# EAGLE board medi_charlie_10x10_with_header (EAGLE 6.2)
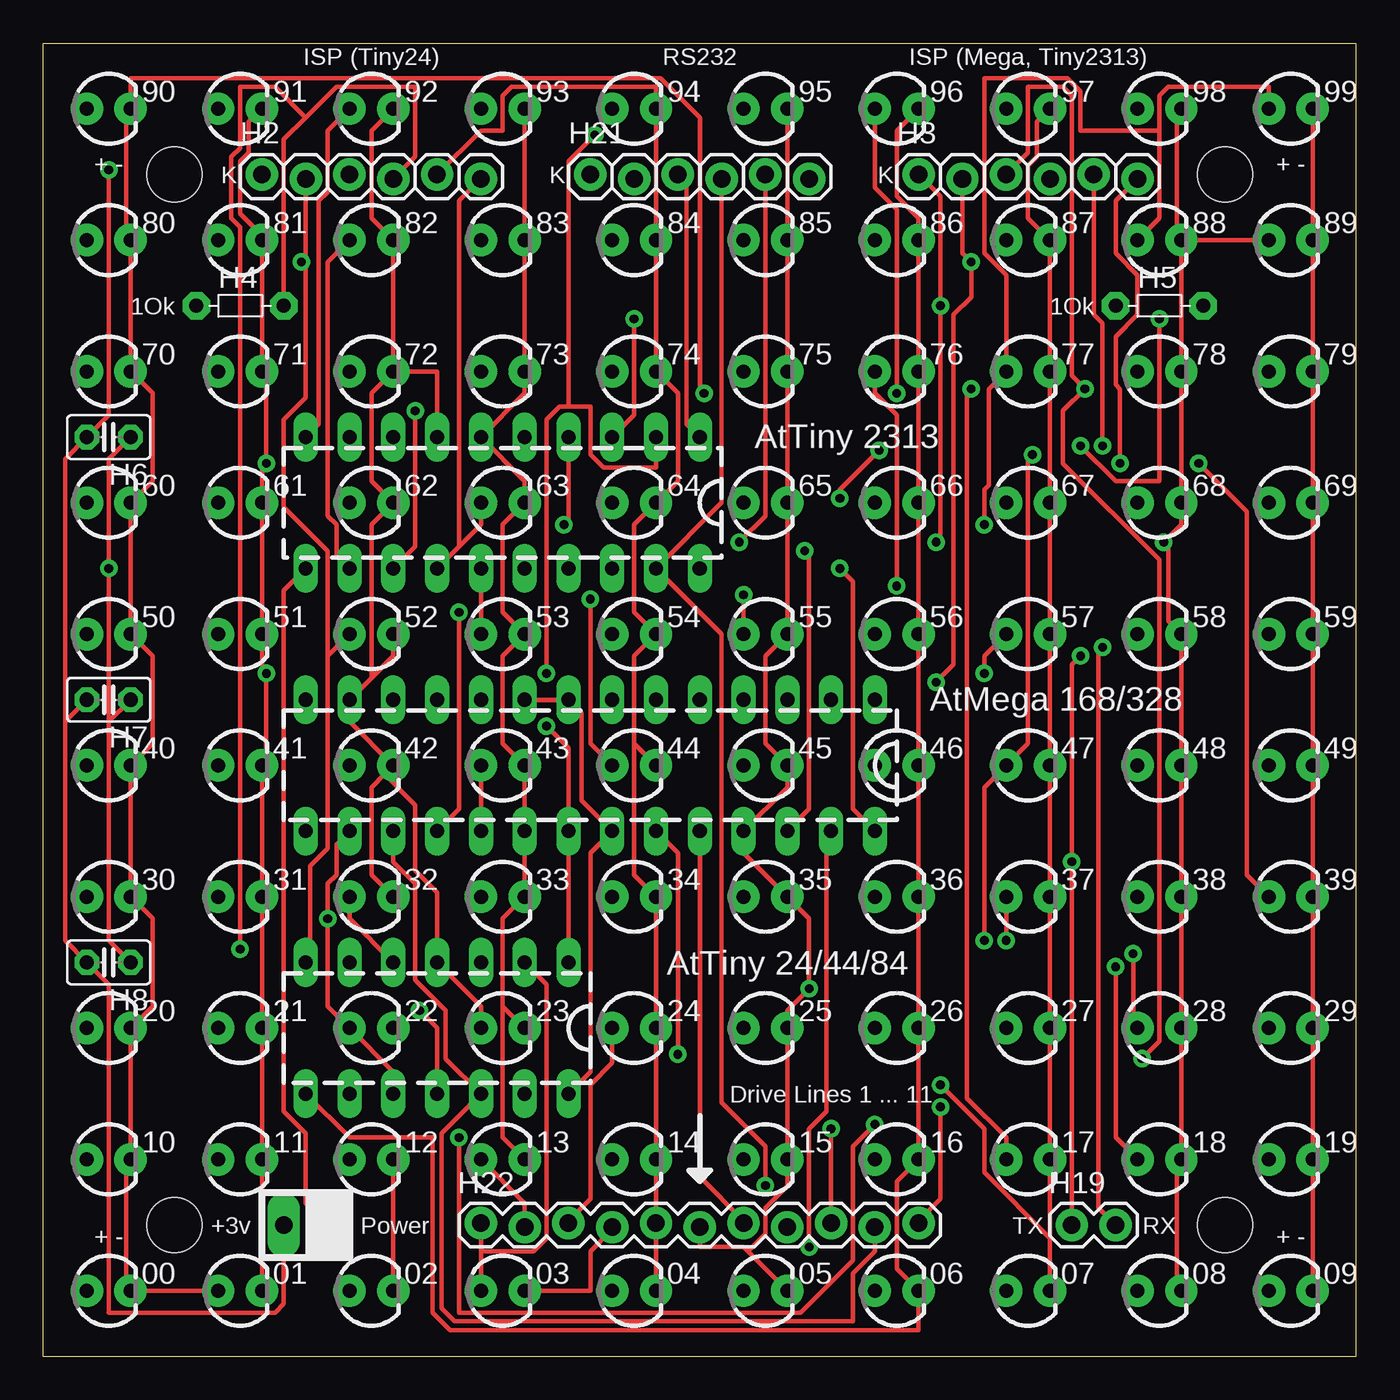
[diagram p0: board, top side]
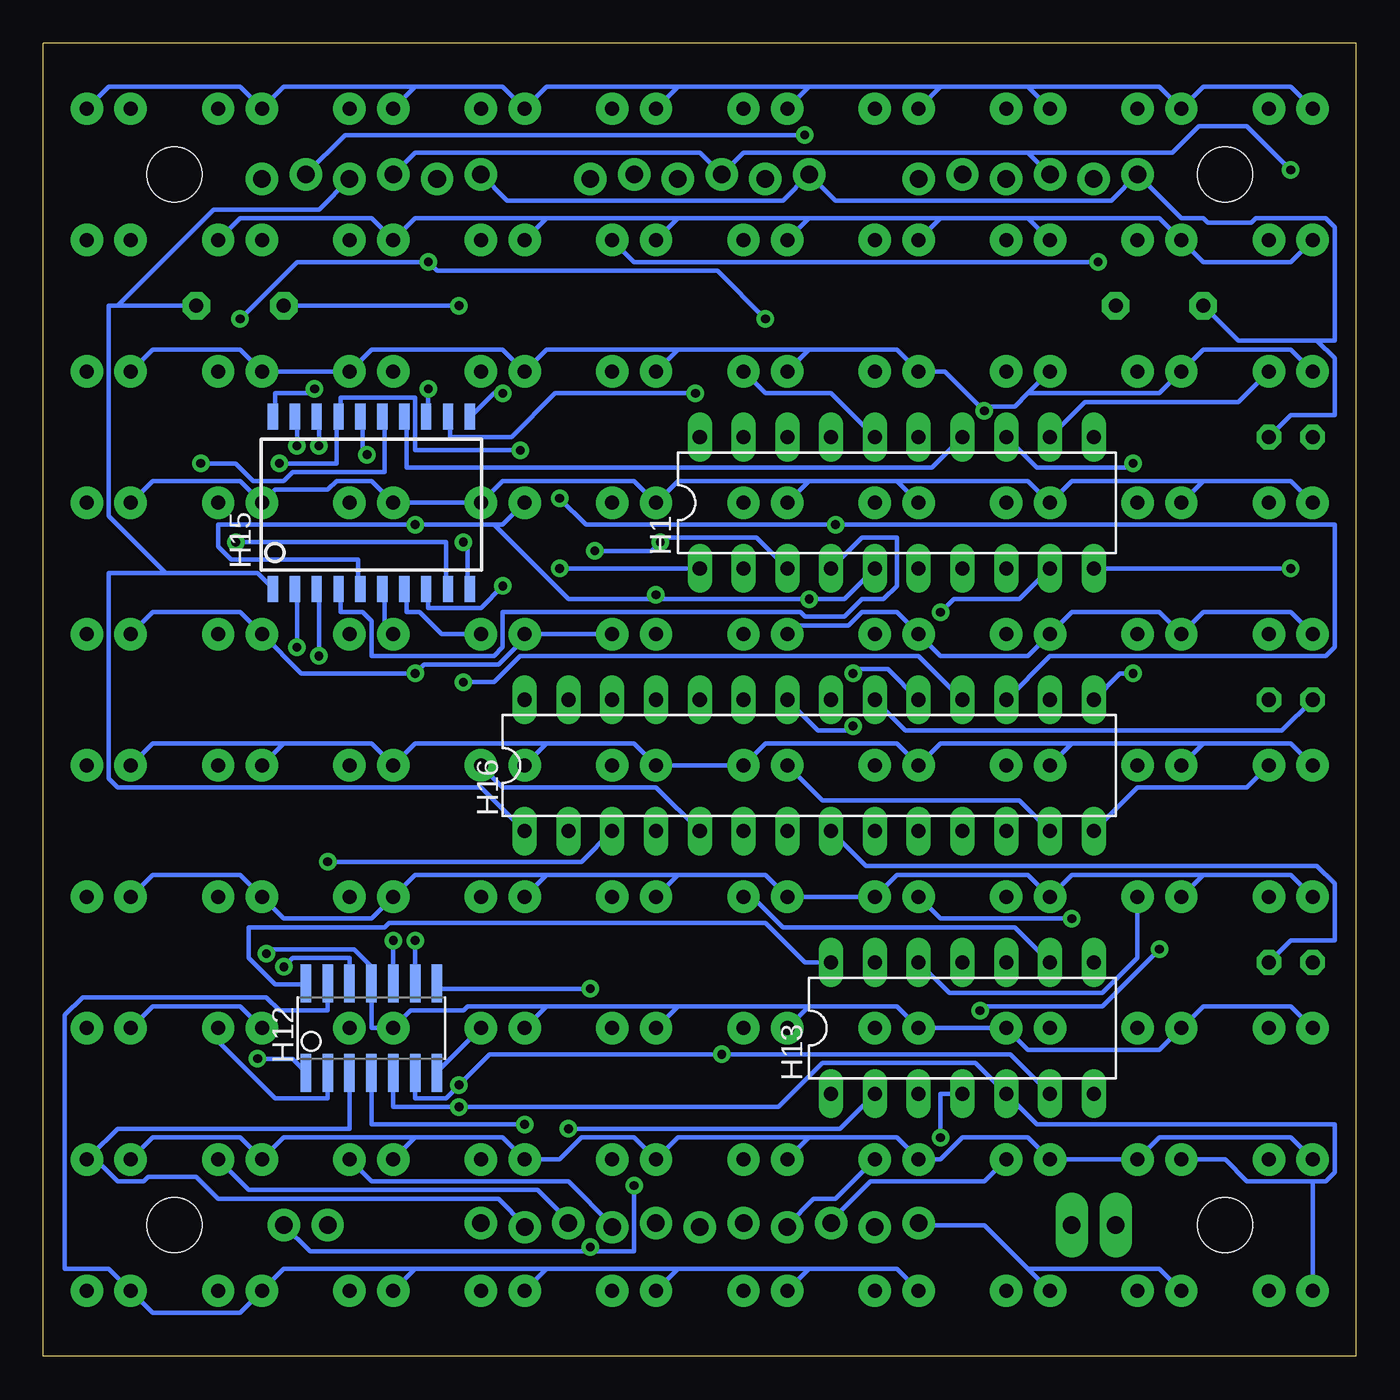
[diagram p1: board, bottom side, seen from below]

Size 76.2 x 76.2 mm. Coordinates in mm from the lower left corner, seen from the top.
Outline: 0,0 0,76.2 76.2,76.2 76.2,0 0,0
Copper layers (1*16): Top 0.035mm / dielectric 1.5mm / Bottom 0.035mm
Design rules: minimum track width 10mil, minimum drill 20mil, track to track 8mil, track to pad 8mil, pad to pad 8mil, via to via 8mil, smd to smd 8mil, copper to edge 40mil, drill to drill 8mil, minimum pad ring 12mil, minimum via ring 10mil, stop-mask expansion 4mil, vias tented up to drill 25mil, thermal gap 10mil
Holes 3.2 mm at 7.62,7.62 7.62,68.58 68.58,7.62 68.58,68.58

## Footprints (pad centres in the part's own frame; a part is rotated, then mirrored left to right if it is on the bottom)
LED3MM = drill 0.813 pad 1.88: A -1.27,0; K 1.27,0
DIL20 = drill 0.813 long: 1 -11.43,-3.81; 2 -8.89,-3.81; 3 -6.35,-3.81; 4 -3.81,-3.81; 5 -1.27,-3.81; 6 1.27,-3.81; 7 3.81,-3.81; 8 6.35,-3.81; 9 8.89,-3.81; 10 11.43,-3.81; 11 11.43,3.81; 12 8.89,3.81; 13 6.35,3.81; 14 3.81,3.81; 15 1.27,3.81; 16 -1.27,3.81; 17 -3.81,3.81; 18 -6.35,3.81; 19 -8.89,3.81; 20 -11.43,3.81
1X06_LOCK = drill 1.016 pad 1.88: 1 0,0; 2 2.54,-0.254; 3 5.08,0; 4 7.62,-0.254; 5 10.16,0; 6 12.7,-0.254
R-5 = drill 0.813 pad 1.6 octagon: 1 -2.54,0; 2 2.54,0
C025-025X050 = drill 0.813 octagon: 1 -1.27,0; 2 1.27,0
SOIC14 = smd 0.61 x 2.21: 1 -3.81,-2.603; 2 -2.54,-2.603; 3 -1.27,-2.603; 4 0,-2.603; 5 1.27,-2.603; 6 2.54,-2.603; 7 3.81,-2.603; 8 3.81,2.603; 9 2.54,2.603; 10 1.27,2.603; 11 0,2.603; 12 -1.27,2.603; 13 -2.54,2.603; 14 -3.81,2.603
DIL14 = drill 0.813 long: 1 -7.62,-3.81; 2 -5.08,-3.81; 3 -2.54,-3.81; 4 0,-3.81; 5 2.54,-3.81; 6 5.08,-3.81; 7 7.62,-3.81; 8 7.62,3.81; 9 5.08,3.81; 10 2.54,3.81; 11 0,3.81; 12 -2.54,3.81; 13 -5.08,3.81; 14 -7.62,3.81
SOIC20S = smd 0.6 x 1.5: 1 -5.715,-5; 2 -4.445,-5; 3 -3.175,-5; 4 -1.905,-5; 5 -0.635,-5; 6 0.635,-5; 7 1.905,-5; 8 3.175,-5; 9 4.445,-5; 10 5.715,-5; 11 5.715,5; 12 4.445,5; 13 3.175,5; 14 1.905,5; 15 0.635,5; 16 -0.635,5; 17 -1.905,5; 18 -3.175,5; 19 -4.445,5; 20 -5.715,5
DIL28-3 = drill 0.813 long: 1 -16.51,-3.81; 2 -13.97,-3.81; 3 -11.43,-3.81; 4 -8.89,-3.81; 5 -6.35,-3.81; 6 -3.81,-3.81; 7 -1.27,-3.81; 8 1.27,-3.81; 9 3.81,-3.81; 10 6.35,-3.81; 11 8.89,-3.81; 12 11.43,-3.81; 13 13.97,-3.81; 14 16.51,-3.81; 15 16.51,3.81; 16 13.97,3.81; 17 11.43,3.81; 18 8.89,3.81; 19 6.35,3.81; 20 3.81,3.81; 21 1.27,3.81; 22 -1.27,3.81; 23 -3.81,3.81; 24 -6.35,3.81; 25 -8.89,3.81; 26 -11.43,3.81; 27 -13.97,3.81; 28 -16.51,3.81
1X02_LONGPADS = drill 1.016 pad 1.88 long: 1 0,0; 2 2.54,0
1X02 = drill 1.016 pad 1.88: 1 0,0; 2 2.54,0
1X11_LOCK = drill 1.016 pad 1.88: 1 0,0.127; 2 2.54,-0.127; 3 5.08,0.127; 4 7.62,-0.127; 5 10.16,0.127; 6 12.7,-0.127; 7 15.24,0.127; 8 17.78,-0.127; 9 20.32,0.127; 10 22.86,-0.127; 11 25.4,0.127

## Placement (x,y rotation side)
00  [LED3MM]  3.81,3.81 0 top
01  [LED3MM]  11.43,3.81 0 top
02  [LED3MM]  19.05,3.81 0 top
03  [LED3MM]  26.67,3.81 0 top
04  [LED3MM]  34.29,3.81 0 top
05  [LED3MM]  41.91,3.81 0 top
06  [LED3MM]  49.53,3.81 0 top
07  [LED3MM]  57.15,3.81 0 top
08  [LED3MM]  64.77,3.81 0 top
09  [LED3MM]  72.39,3.81 0 top
10  [LED3MM]  3.81,11.43 0 top
11  [LED3MM]  11.43,11.43 0 top
12  [LED3MM]  19.05,11.43 0 top
13  [LED3MM]  26.67,11.43 0 top
14  [LED3MM]  34.29,11.43 0 top
15  [LED3MM]  41.91,11.43 0 top
16  [LED3MM]  49.53,11.43 0 top
17  [LED3MM]  57.15,11.43 0 top
18  [LED3MM]  64.77,11.43 0 top
19  [LED3MM]  72.39,11.43 0 top
20  [LED3MM]  3.81,19.05 0 top
21  [LED3MM]  11.43,19.05 0 top
22  [LED3MM]  19.05,19.05 0 top
23  [LED3MM]  26.67,19.05 0 top
24  [LED3MM]  34.29,19.05 0 top
25  [LED3MM]  41.91,19.05 0 top
26  [LED3MM]  49.53,19.05 0 top
27  [LED3MM]  57.15,19.05 0 top
28  [LED3MM]  64.77,19.05 0 top
29  [LED3MM]  72.39,19.05 0 top
30  [LED3MM]  3.81,26.67 0 top
31  [LED3MM]  11.43,26.67 0 top
32  [LED3MM]  19.05,26.67 0 top
33  [LED3MM]  26.67,26.67 0 top
34  [LED3MM]  34.29,26.67 0 top
35  [LED3MM]  41.91,26.67 0 top
36  [LED3MM]  49.53,26.67 0 top
37  [LED3MM]  57.15,26.67 0 top
38  [LED3MM]  64.77,26.67 0 top
39  [LED3MM]  72.39,26.67 0 top
40  [LED3MM]  3.81,34.29 0 top
41  [LED3MM]  11.43,34.29 0 top
42  [LED3MM]  19.05,34.29 0 top
43  [LED3MM]  26.67,34.29 0 top
44  [LED3MM]  34.29,34.29 0 top
45  [LED3MM]  41.91,34.29 0 top
46  [LED3MM]  49.53,34.29 0 top
47  [LED3MM]  57.15,34.29 0 top
48  [LED3MM]  64.77,34.29 0 top
49  [LED3MM]  72.39,34.29 0 top
50  [LED3MM]  3.81,41.91 0 top
51  [LED3MM]  11.43,41.91 0 top
52  [LED3MM]  19.05,41.91 0 top
53  [LED3MM]  26.67,41.91 0 top
54  [LED3MM]  34.29,41.91 0 top
55  [LED3MM]  41.91,41.91 0 top
56  [LED3MM]  49.53,41.91 0 top
57  [LED3MM]  57.15,41.91 0 top
58  [LED3MM]  64.77,41.91 0 top
59  [LED3MM]  72.39,41.91 0 top
60  [LED3MM]  3.81,49.53 0 top
61  [LED3MM]  11.43,49.53 0 top
62  [LED3MM]  19.05,49.53 0 top
63  [LED3MM]  26.67,49.53 0 top
64  [LED3MM]  34.29,49.53 0 top
65  [LED3MM]  41.91,49.53 0 top
66  [LED3MM]  49.53,49.53 0 top
67  [LED3MM]  57.15,49.53 0 top
68  [LED3MM]  64.77,49.53 0 top
69  [LED3MM]  72.39,49.53 0 top
70  [LED3MM]  3.81,57.15 0 top
71  [LED3MM]  11.43,57.15 0 top
72  [LED3MM]  19.05,57.15 0 top
73  [LED3MM]  26.67,57.15 0 top
74  [LED3MM]  34.29,57.15 0 top
75  [LED3MM]  41.91,57.15 0 top
76  [LED3MM]  49.53,57.15 0 top
77  [LED3MM]  57.15,57.15 0 top
78  [LED3MM]  64.77,57.15 0 top
79  [LED3MM]  72.39,57.15 0 top
80  [LED3MM]  3.81,64.77 0 top
81  [LED3MM]  11.43,64.77 0 top
82  [LED3MM]  19.05,64.77 0 top
83  [LED3MM]  26.67,64.77 0 top
84  [LED3MM]  34.29,64.77 0 top
85  [LED3MM]  41.91,64.77 0 top
86  [LED3MM]  49.53,64.77 0 top
87  [LED3MM]  57.15,64.77 0 top
88  [LED3MM]  64.77,64.77 0 top
89  [LED3MM]  72.39,64.77 0 top
90  [LED3MM]  3.81,72.39 0 top
91  [LED3MM]  11.43,72.39 0 top
92  [LED3MM]  19.05,72.39 0 top
93  [LED3MM]  26.67,72.39 0 top
94  [LED3MM]  34.29,72.39 0 top
95  [LED3MM]  41.91,72.39 0 top
96  [LED3MM]  49.53,72.39 0 top
97  [LED3MM]  57.15,72.39 0 top
98  [LED3MM]  64.77,72.39 0 top
99  [LED3MM]  72.39,72.39 0 top
H1  [DIL20]  26.67,49.53 0 bottom
H2  [1X06_LOCK]  12.7,68.58 0 top
H3  [1X06_LOCK]  50.8,68.58 0 top
H4  [R-5]  11.43,60.96 0 top
H5  [R-5]  64.77,60.96 0 top
H6  [C025-025X050]  3.81,53.34 180 top
H7  [C025-025X050]  3.81,38.1 180 top
H8  [C025-025X050]  3.81,22.86 180 top
H12  [SOIC14]  57.15,19.05 0 bottom
H13  [DIL14]  22.86,19.05 0 bottom
H15  [SOIC20S]  57.15,49.53 0 bottom
H16  [DIL28-3]  31.75,34.29 0 bottom
H17  [1X02_LONGPADS]  13.97,7.62 0 top
H19  [1X02]  59.69,7.62 0 top
H21  [1X06_LOCK]  31.75,68.58 0 top
H22  [1X11_LOCK]  25.4,7.62 0 top

## Library data of the parts
00 01-09 10-99 H2 H3 H17 H19 H21 H22 = SparkFun
H1 H13 H16 = 40xx
H4 H5 = discrete
H6-H8 = ref-packages
H12 = avr-5-4.16
H15 = atmel

## Nets
D: 00.A 11.A 22.A 33.A 44.A 55.A 66.A 77.A 88.A 99.A H1.5 H12.5 H13.5 H15.5 H16.13 H22.11
S0: 00.K 01.A 02.A 03.A 04.A 05.A 06.A 07.A 08.A 09.A 10.K 20.K 30.K 40.K 50.K 60.K 70.K 80.K 90.K H1.12 H12.13 H13.13 H15.12 H16.14 H22.1
S1: 01.K 10.A 11.K 12.A 13.A 14.A 15.A 16.A 17.A 18.A 19.A 21.K 31.K 41.K 51.K 61.K 71.K 81.K 91.K H1.13 H12.12 H13.12 H15.13 H16.15 H22.2
S2: 02.K 12.K 20.A 21.A 22.K 23.A 24.A 25.A 26.A 27.A 28.A 29.A 32.K 42.K 52.K 62.K 72.K 82.K 92.K H1.14 H12.11 H13.11 H15.14 H16.16 H22.3
S3: 03.K 13.K 23.K 30.A 31.A 32.A 33.K 34.A 35.A 36.A 37.A 38.A 39.A 43.K 53.K 63.K 73.K 83.K 93.K H1.15 H12.10 H13.10 H15.15 H16.9 H22.4
S4: 04.K 14.K 24.K 34.K 40.A 41.A 42.A 43.A 44.K 45.A 46.A 47.A 48.A 49.A 54.K 64.K 74.K 84.K 94.K H1.16 H2.5 H12.9 H13.9 H15.16 H16.10 H22.5
S5: 05.K 15.K 25.K 35.K 45.K 50.A 51.A 52.A 53.A 54.A 55.K 56.A 57.A 58.A 59.A 65.K 75.K 85.K 95.K H1.6 H2.2 H12.8 H13.8 H15.6 H16.4 H22.6
S6: 06.K 16.K 26.K 36.K 46.K 56.K 60.A 61.A 62.A 63.A 64.A 65.A 66.K 67.A 68.A 69.A 76.K 86.K 96.K H1.7 H2.6 H12.7 H13.7 H15.7 H16.5 H22.7
S7: 07.K 17.K 27.K 37.K 47.K 57.K 67.K 70.A 71.A 72.A 73.A 74.A 75.A 76.A 77.K 78.A 79.A 87.K 97.K H1.8 H12.6 H13.6 H15.8 H16.6 H22.8
S8: 08.K 18.K 28.K 38.K 48.K 58.K 68.K 78.K 80.A 81.A 82.A 83.A 84.A 85.A 86.A 87.A 88.K 89.A 98.K H1.9 H12.2 H13.2 H15.9 H16.11 H22.9
S9: 09.K 19.K 29.K 39.K 49.K 59.K 69.K 79.K 89.K 90.A 91.A 92.A 93.A 94.A 95.A 96.A 97.A 98.A 99.K H1.11 H12.3 H13.3 H15.11 H16.12 H22.10
S$1: H2.4 H4.2 H12.4 H13.4
S$2: H1.18 H3.2 H15.18 H16.18
S$5: H1.2 H15.2 H16.2 H19.2 H21.4
S$6: H1.3 H15.3 H16.3 H19.1 H21.5
S$7: H1.17 H3.6 H15.17 H16.17
S$8: H1.1 H3.4 H5.2 H15.1 H16.1
S$9: H1.19 H3.5 H15.19 H16.19
S$10: H1.4 H15.4
S$11: H1.20 H2.3 H3.3 H6.2 H7.2 H8.2 H12.1 H13.1 H15.20 H16.7 H16.20 H16.21 H17.1 H21.3
S$12: H1.10 H2.1 H3.1 H4.1 H5.1 H6.1 H7.1 H8.1 H12.14 H13.14 H15.10 H16.8 H16.22 H17.2 H21.1

## Tracks (layer width: path | path; a pad name or v marks a point on that pad's centre or on a via)
D  (via drill 0.51)
  Top 0.254: 88.A 64.77,66.04 64.77,71.12 | 64.77,71.12 64.77,73.15 65.28,73.66 71.12,73.66 99.A | v40.64,44.2 55.A | v54.61,48.26 54.61,50.29 54.86,50.55 54.86,56.13 77.A 55.88,62.74 54.61,64.01 54.61,74.17 59.44,74.17 60.2,73.41 60.2,71.12 64.77,71.12 | H16.13 17.02,29.72 17.02,27.94 16.51,27.43 v16.51,25.4 16.51,20.32 22.A 20.32,16.51 H13.5 | v52.07,14.48 52.07,9.14 50.8,7.87 H22.11 | v31.75,43.94 31.75,35.56 44.A
  Bottom 0.254: 50.04,48.26 49.53,48.26 66.A | 50.04,48.26 v54.61,48.26 66.04,48.26 66.04,46.99 65.28,46.23 57.91,46.23 57.91,44.7 H15.5 | H1.5 29.72,43.94 v31.75,43.94 40.64,43.94 | 40.64,43.94 45.72,43.94 50.04,48.26 | 40.64,43.94 v40.64,44.2 | 33.A 24.13,25.4 v16.51,25.4 | 44.A 30.99,32.26 19.56,32.26 H16.13 | 2.54,10.16 00.A | 2.54,10.16 6.35,10.16 7.62,11.43 11.A | H12.5 55.88,14.48 v52.07,14.48 33.53,14.48 30.99,17.02 22.1,17.02 H13.5 18.54,13.46 1.27,13.46 1.27,10.67 1.78,10.16 2.54,10.16
S0  (via drill 0.51)
  Top 0.254: 01.A 00.K 4.83,4.06 4.83,11.18 10.K 20.K 6.35,20.32 6.35,25.4 30.K 40.K 6.35,35.56 6.35,40.64 50.K 60.K 6.35,50.8 6.35,55.88 70.K 80.K 4.83,65.02 4.83,72.14 90.K 5.08,74.17 35.81,74.17 38.1,71.88 38.1,56.13 v38.35,55.88 | H13.13 29.21,21.59 29.21,6.86 28.45,6.1 25.4,6.1 | H22.1 25.4,6.1 | 25.4,6.1 03.A
  Bottom 0.254: H12.13 59.69,20.07 62.48,20.07 63.25,20.83 73.91,20.83 74.93,19.81 74.93,5.08 72.39,5.08 09.A 69.85,2.54 64.77,2.54 08.A 62.23,5.08 54.61,5.08 | 19.05,5.08 21.59,7.62 25.4,7.62 H22.1 | 19.05,5.08 02.A | 31.75,5.08 04.A | 31.75,5.08 26.67,5.08 03.A | 39.37,5.08 05.A | 31.75,5.08 39.37,5.08 | 46.99,5.08 06.A | 39.37,5.08 46.99,5.08 | 54.61,5.08 07.A | 46.99,5.08 54.61,5.08 | 01.A 11.43,5.08 19.05,5.08 | H16.14 12.7,33.02 6.35,33.02 40.K | H1.12 15.75,55.37 6.86,55.37 70.K | v38.35,55.88 46.48,55.88 49.02,53.34 52.58,53.34 52.58,54.36 H15.12
S1  (via drill 0.51)
  Top 0.254: 91.K 11.94,71.63 11.94,69.85 11.43,69.34 11.43,66.29 12.7,65.02 81.K 71.K 12.95,56.9 v12.95,51.82 12.7,51.56 61.K 51.K 12.7,39.88 v12.95,39.62 12.95,34.54 41.K 31.K 21.K 11.K 01.K | v62.23,22.61 62.23,12.7 18.A | 13.A 27.94,8.89 H22.2 | v53.85,56.13 53.59,55.88 53.59,14.99 55.88,12.7 17.A
  Bottom 0.254: H1.13 18.54,51.56 13.21,51.56 v12.95,51.82 | 10.A 3.81,12.7 11.43,12.7 11.K 12.A 19.05,12.7 22.86,12.7 24.13,11.43 13.A 26.67,12.7 31.75,12.7 | H16.15 13.72,39.62 v12.95,39.62 | H13.12 23.62,21.08 14.73,21.08 12.7,23.11 31.K | H12.12 58.42,23.11 61.72,23.11 v62.23,22.61 | 19.A 69.85,12.7 64.77,12.7 18.A 62.23,12.7 54.61,12.7 | 31.75,12.7 14.A | 31.75,12.7 39.37,12.7 15.A 41.91,12.7 44.96,12.7 46.23,11.43 16.A 49.53,12.7 54.61,12.7 | v53.85,56.13 53.85,54.61 H15.13 | 17.A 54.61,12.7
S2  (via drill 0.51)
  Top 0.254: 32.K 19.05,27.94 19.05,33.02 19.81,33.78 | 19.05,39.37 20.32,40.64 52.K | 19.05,39.37 H16.16 17.78,36.83 42.K 19.81,33.78 | 19.05,39.37 19.05,48.26 62.K 19.05,50.8 19.05,55.88 72.K | 72.K 22.86,57.15 H1.14 | 72.K 82.K 19.05,66.04 19.05,71.12 92.K | 12.K 02.K | 23.A 25.4,20.32 H13.11 22.86,26.92 21.59,28.19 21.59,32 19.81,33.78 | 28.A 63.25,19.3 v63.25,23.37 | 24.A 33.02,17.02 31.75,15.75 31.75,9.14 30.48,7.87 H22.3
  Bottom 0.254: H1.14 24.64,51.56 55.12,51.56 55.12,54.36 H15.14 | 12.K 21.59,10.16 28.19,10.16 30.48,7.87 H22.3 | 28.A 64.77,20.32 69.85,20.32 29.A | 20.A 3.81,20.32 8.89,20.32 21.A 11.43,17.78 19.05,17.78 22.K 23.A 26.67,20.32 31.75,20.32 | 31.75,20.32 24.A | 39.37,20.32 25.A | 31.75,20.32 39.37,20.32 | 46.99,20.32 26.A | 39.37,20.32 46.99,20.32 | 46.99,20.32 51.56,20.32 51.82,20.07 54.86,20.07 27.A 57.15,19.05 H12.11 57.15,22.61 58.17,23.62 62.99,23.62 v63.25,23.37
S3  (via drill 0.51)
  Top 0.254: v67.06,51.82 69.85,49.02 69.85,27.94 39.A | 93.K 83.K 73.K 27.94,55.88 H1.15 27.94,50.8 63.K 26.67,48.26 26.67,43.18 53.K 26.67,40.64 26.67,35.56 43.K H16.9 33.K 26.67,25.4 26.67,20.32 | H13.10 17.78,25.4 32.A | 03.K 31.75,3.81 31.75,6.1 33.02,7.37 H22.4 | 37.A v55.88,24.13 | 26.67,20.32 23.K | 13.K 26.67,12.7 26.67,20.32
  Bottom 0.254: v67.06,51.82 65.02,51.82 64.01,50.8 62.23,50.8 61.72,51.31 56.39,51.31 56.39,54.36 H15.15 | 39.A 69.85,27.94 64.77,27.94 38.A 62.23,25.4 57.15,25.4 37.A 54.61,27.94 46.99,27.94 | 30.A 3.81,27.94 8.89,27.94 | 31.A 8.89,27.94 | 8.89,27.94 16.51,27.94 32.A 19.05,27.94 26.67,27.94 33.K 34.A 34.29,27.94 39.37,27.94 | 13.K 30.23,9.14 31.5,9.14 33.02,7.62 H22.4 | v55.88,24.13 H12.10 | 39.37,27.94 35.A | 46.99,27.94 36.A | 39.37,27.94 46.99,27.94
S4  (via drill 0.51)
  Top 0.254: v57.4,52.32 57.15,52.07 57.15,35.56 47.A 54.61,33.02 v54.61,24.13 | 04.K H22.5 14.K 24.K 34.K 34.29,27.94 34.29,35.56 | H2.5 25.4,71.12 26.67,71.12 26.67,73.15 27.18,73.66 35.56,73.66 94.K 84.K 74.K 36.83,55.88 36.83,50.8 64.K 34.29,48.26 34.29,43.18 54.K 34.29,40.64 34.29,35.56 | 43.A H16.10 | 44.K 34.29,35.56
  Bottom 0.254: v57.4,52.32 57.66,52.32 57.66,54.36 H15.16 | v54.61,24.13 H12.9 | 62.23,35.56 48.A | 62.23,35.56 57.15,35.56 47.A 54.61,35.56 46.99,35.56 | 49.A 69.85,35.56 62.23,35.56 | H13.9 19.81,24.89 33.27,24.89 35.05,26.67 34.K | H1.16 30.48,55.88 34.29,55.88 74.K | 40.A 3.81,35.56 8.89,35.56 | 41.A 8.89,35.56 | 16.51,35.56 42.A | 8.89,35.56 16.51,35.56 | 16.51,35.56 24.13,35.56 43.A 26.67,35.56 34.29,35.56 44.K 45.A 41.91,35.56 46.99,35.56 | 46.99,35.56 46.A
S5  (via drill 0.51)
  Top 0.254: 53.A H1.6 | H13.8 15.49,23.11 15.49,28.45 16.51,29.46 16.51,40.64 | 52.A 16.51,40.64 | 15.24,63.5 15.24,55.63 13.97,54.36 13.97,49.28 16.51,46.74 16.51,40.64 | 15.24,63.5 H2.2 | 40.89,6.1 40.64,6.35 38.1,6.35 H22.6 | 40.89,6.1 05.K | 40.89,6.1 41.91,7.11 41.91,8.64 43.18,9.91 15.K 25.K 43.18,20.07 v44.45,21.34 44.45,25.4 35.K 40.64,29.21 H16.4 43.18,33.02 45.K 41.91,35.56 41.91,40.64 55.K 65.K 75.K 85.K 95.K | 57.A 54.61,40.64 v54.61,39.62 | v14.99,63.5 15.24,63.5
  Bottom 0.254: 54.A 32.51,42.42 29.46,42.42 28.7,43.18 26.67,43.18 53.A 24.13,40.64 19.05,40.64 52.A 16.51,43.18 11.43,43.18 51.A 8.89,43.18 3.81,43.18 50.A | v44.45,21.34 53.09,21.34 53.34,21.59 H12.8 | 59.A 69.85,43.18 64.77,43.18 58.A 61.21,39.62 v54.61,39.62 54.1,40.13 49.78,40.13 48.01,41.91 | 57.A 56.39,41.91 56.39,44.45 H15.6 | 48.01,41.91 55.K | 48.01,41.91 56.A | v14.99,63.5 41.91,63.5 85.K
S6
  Top 0.254: 24.13,46.99 25.4,48.26 63.A | 24.13,46.99 H1.7 | H2.6 24.13,67.06 24.13,46.99 | H13.7 17.78,12.7 22.61,12.7 22.61,2.54 23.62,1.52 50.8,1.52 06.K 49.53,5.08 49.53,10.16 16.K 26.K 36.K 46.K 56.K 66.K 76.K 86.K 50.8,66.04 49.53,67.31 49.53,71.12 96.K | H16.5 38.1,10.41 40.64,7.87 H22.7
  Bottom 0.254: 60.A 3.81,50.8 8.89,50.8 | 61.A 8.89,50.8 | 8.89,50.8 16.51,50.8 62.A 19.05,50.8 26.67,50.8 | 31.75,50.8 64.A | 26.67,50.8 31.75,50.8 | 63.A 26.67,50.8 | 31.75,50.8 39.37,50.8 65.A 41.91,50.8 49.53,50.8 66.K 67.A 57.15,50.8 59.18,50.8 59.69,50.29 62.74,50.29 68.A 64.77,50.8 69.85,50.8 69.A | 26.K 53.34,16.51 H12.7 | H16.5 40.64,33.02 49.53,33.02 46.K | 56.K 53.09,41.91 54.36,43.18 55.12,43.18 55.12,44.45 H15.7
S7  (via drill 0.51)
  Top 0.254: v49.53,44.7 49.53,54.61 48.26,55.88 76.A | H1.8 21.59,46.99 v21.59,54.86 | H16.6 36.83,29.21 v36.83,17.53 | 97.K 57.66,71.63 57.66,69.6 57.15,69.09 57.15,66.04 87.K 77.K 67.K 57.K 47.K 37.K 27.K 17.K 58.42,6.86 | 58.42,6.86 07.K | v52.07,15.75 54.61,13.21 54.61,10.67 58.42,6.86
  Bottom 0.254: v49.53,44.7 50.8,43.43 53.85,43.43 53.85,44.45 H15.8 | 70.A 3.81,58.42 8.89,58.42 71.A 11.43,55.88 19.05,55.88 | 21.84,55.12 23.88,57.15 73.A 26.67,58.42 31.75,58.42 | 19.05,55.88 19.81,55.12 21.84,55.12 | 19.05,55.88 72.A | 21.84,55.12 v21.59,54.86 | 31.75,58.42 74.A | 39.37,58.42 75.A | 31.75,58.42 39.37,58.42 | 39.37,58.42 46.99,58.42 76.A 49.53,58.42 57.15,58.42 77.K 78.A 64.77,58.42 69.85,58.42 79.A | H12.6 54.61,14.99 52.83,14.99 v52.07,15.75 50.29,17.53 v36.83,17.53 20.07,17.53 H13.6 | 17.K 57.15,10.16 45.72,10.16 43.18,7.62 H22.8
S8  (via drill 0.51)
  Top 0.254: H1.9 17.02,46.48 17.02,48.26 16.51,48.77 16.51,63.5 82.A | H16.11 24.13,31.75 v24.13,43.18 | H22.9 v45.72,13.21 | 88.K 78.K 68.K 66.04,48.26 65.28,47.5 | 88.K 89.A | 98.K 65.79,72.14 65.79,65.02 88.K | 65.28,47.5 65.28,42.67 58.K 48.K 38.K 28.K 18.K 65.79,11.18 65.79,4.06 08.K | 65.28,47.5 v65.02,47.24
  Bottom 0.254: 80.A 3.81,63.5 8.89,63.5 81.A 11.43,66.04 19.05,66.04 | v24.13,43.18 23.37,43.94 19.56,43.94 H1.9 | 24.13,66.04 83.A | 19.05,66.04 24.13,66.04 | 82.A 19.05,66.04 | 31.75,66.04 84.A | 24.13,66.04 31.75,66.04 | 39.37,66.04 85.A | 31.75,66.04 39.37,66.04 | 46.99,66.04 86.A | 39.37,66.04 46.99,66.04 | 46.99,66.04 54.61,66.04 87.A 57.15,66.04 64.77,66.04 88.K | H13.2 29.97,13.21 v45.72,13.21 | v65.02,47.24 52.83,47.24 52.83,44.7 H15.9 | H12.2 59.69,14.99 62.74,14.99 66.04,18.29 28.K | 18.K 64.26,9.65 47.5,9.65 45.72,7.87 H22.9
S9  (via drill 0.51)
  Top 0.254: v49.53,55.88 49.53,66.55 48.26,67.82 96.A | H1.11 16,54.1 16,67.06 16.51,67.56 16.51,71.12 92.A | H16.12 20.32,28.7 21.59,27.43 21.59,21.84 23.37,20.07 23.37,17.27 H13.3 23.11,12.95 23.11,2.79 23.88,2.03 46.99,2.03 46.99,4.83 48.26,6.1 H22.10 | 99.K 89.K 79.K 69.K 59.K 49.K 39.K 29.K 19.K 09.K
  Bottom 0.254: v49.53,55.88 50.04,55.88 51.31,54.61 H15.11 | 54.61,73.66 97.A | 54.61,73.66 49.53,73.66 96.A 46.99,73.66 39.37,73.66 | 54.61,73.66 62.23,73.66 98.A 64.77,73.66 72.39,73.66 99.K | 90.A 3.81,73.66 8.89,73.66 91.A 11.43,73.66 19.05,73.66 | 24.13,73.66 93.A | 19.05,73.66 24.13,73.66 | 92.A 19.05,73.66 | 31.75,73.66 94.A | 24.13,73.66 31.75,73.66 | 39.37,73.66 95.A | 31.75,73.66 39.37,73.66 | H12.3 58.42,13.21 71.88,13.21 73.41,11.68 | 73.41,11.68 71.88,10.16 70.36,10.16 70.1,10.41 67.31,10.41 66.04,9.14 49.78,9.14 48.26,7.62 H22.10 | 73.41,11.68 19.K
S$1  (via drill 0.51)
  Top 0.254: H4.2 13.97,70.61 15.24,71.88 | 15.24,71.88 17.02,73.66 21.59,73.66 21.59,69.6 H2.4 | v48.26,13.46 46.99,12.19 46.99,5.59 43.94,2.54 24.13,2.54 v24.13,12.7 | 15.24,71.88 13.46,73.66 11.43,73.66 11.43,70.1 10.92,69.6 10.92,66.04 11.43,65.53 v11.43,23.62 | v21.84,20.07 22.86,19.05 H13.4
  Bottom 0.254: H12.4 57.15,13.46 v48.26,13.46 | v24.13,12.7 24.13,15.24 H13.4 | v11.43,23.62 14.73,20.32 21.59,20.32 v21.84,20.07
S$2  (via drill 0.51)
  Top 0.254: v60.2,52.83 62.23,50.8 64.77,50.8 v64.77,60.2 | H3.2 53.34,64.01 v53.85,63.5 53.85,61.47 52.83,60.45 52.83,40.13 v51.82,39.12 | H1.18 34.29,54.61 v34.29,60.2
  Bottom 0.254: v60.2,52.83 60.2,54.36 H15.18 | v64.77,60.2 61.47,63.5 v53.85,63.5 53.34,62.99 37.08,62.99 v34.29,60.2 | H16.18 25.4,40.64 48.51,40.64 50.04,39.12 v51.82,39.12
S$5  (via drill 0.51)
  Top 0.254: H21.4 39.37,49.53 H1.2 39.37,41.91 39.37,14.73 41.91,12.19 v41.91,9.91 | v61.47,41.15 61.21,40.89 61.21,8.64 H19.2 | H16.2 45.47,30.23 45.47,14.22 44.45,13.21 v44.45,6.35
  Bottom 0.254: v61.47,41.15 61.47,44.45 H15.2 | 44.7,6.1 60.71,6.1 H19.2 | v41.91,9.91 41.91,6.1 44.7,6.1 | 44.7,6.1 v44.45,6.35
S$6  (via drill 0.51)
  Top 0.254: v40.39,47.24 41.91,48.77 H21.5 | v60.2,40.64 59.69,40.13 v59.69,28.7 H19.1 | v44.2,46.74 44.45,46.48 44.45,31.75 H16.3
  Bottom 0.254: H1.3 34.8,47.5 40.13,47.5 v40.39,47.24 40.89,46.74 v44.2,46.74 | v60.2,40.64 60.2,44.45 H15.3 | H16.3 44.96,28.7 v59.69,28.7
S$7  (via drill 0.51)
  Top 0.254: v62.48,51.82 62.48,56.13 62.23,56.39 62.23,59.18 63.5,60.45 63.5,62.74 62.23,64.01 62.23,67.06 H3.6 | v30.23,48.26 30.48,48.51 H1.17 | v48.51,52.58 46.23,50.29 v46.23,49.78
  Bottom 0.254: v62.48,51.82 59.18,51.82 59.18,54.36 H15.17 58.93,54.61 58.93,55.63 54.61,55.63 54.61,52.58 v48.51,52.58 | H16.17 17.78,40.64 1.78,40.64 1.27,41.15 1.27,48.26 v30.23,48.26 44.7,48.26 v46.23,49.78
S$8  (via drill 0.51)
  Top 0.254: v46.23,45.72 46.99,44.96 46.99,31.75 H16.1
  Bottom 0.254: 69.09,45.47 63.75,45.47 62.99,44.7 H15.1 | 69.09,45.47 72.39,48.77 72.39,60.96 71.88,60.96 | H5.2 71.88,60.96 | H16.1 50.8,33.02 71.88,33.02 72.39,33.53 72.39,45.47 69.09,45.47 | v46.23,45.72 H1.1 | H3.4 60.2,66.55 66.29,66.55 71.88,60.96
S$9  (via drill 0.51)
  Top 0.254: v61.47,52.83 61.47,59.94 60.96,60.45 H3.5 | v29.21,39.62 29.21,54.36 29.97,55.12 30.48,55.12 | 30.48,55.12 31.75,55.12 31.75,52.32 32.51,51.56 35.56,51.56 H1.19 | v32,70.87 30.48,69.34 30.48,55.12
  Bottom 0.254: v61.47,52.83 61.47,54.36 H15.19 | H16.19 27.18,39.88 28.96,39.88 v29.21,39.62 | H3.5 58.67,70.87 v32,70.87
S$10
  Bottom 0.254: H1.4 28.7,47.5 26.67,47.5 26.67,44.7 27.43,43.94 28.7,43.94 29.72,42.93 32,42.93 32.26,43.18 49.53,43.18 49.53,41.15 50.04,40.64 57.15,40.64 57.15,42.67 57.66,43.18 58.93,43.18 58.93,44.45 H15.4
S$11  (via drill 0.51)
  Top 0.254: H16.20 H16.21 31.24,37.34 31.24,32.26 H16.7 31.75,29.21 31.75,16.51 H13.1 | 1.27,36.83 1.27,24.13 H8.2 3.81,21.59 3.81,2.54 13.46,2.54 13.97,3.05 H17.1 | H7.2 1.27,36.83 | 1.27,36.83 1.27,52.07 H6.2 3.81,54.61 v3.81,68.83 | H1.20 37.34,54.1 37.34,68.07 H21.3 | H3.3 57.15,69.85 57.15,73.66 59.18,73.66 59.69,73.15 59.69,56.9 v60.45,56.13 59.18,54.86 59.18,51.82 64.77,46.23 64.77,18.29 v63.75,17.27
  Bottom 0.254: H16.20 26.16,36.32 4.32,36.32 H7.2 | 19.05,69.85 H2.3 | 19.05,69.85 35.56,69.85 H21.3 38.1,69.85 54.61,69.85 H3.3 | v60.45,56.13 60.71,55.88 62.74,55.88 62.74,54.61 H15.20 | v63.75,17.27 61.72,17.27 60.96,16.51 H12.1 | v3.81,68.83 6.35,71.37 9.14,71.37 10.67,69.85 19.05,69.85
S$12  (via drill 0.51)
  Top 0.254: v51.82,47.24 52.07,47.5 v52.07,60.96 52.07,67.31 H3.1 | H13.14 H16.8 30.48,35.31 v29.21,36.58 | H8.1 3.81,24.13 3.81,36.83 | H7.1 3.81,36.83 | H6.1 3.81,52.07 v3.81,45.72 3.81,36.83 | H17.2 15.24,8.89 15.24,12.95 13.97,14.22 13.97,44.45 H1.10
  Bottom 0.254: v51.82,47.24 51.56,47.24 51.56,44.7 H15.10 | v52.07,60.96 H5.1 | H3.1 49.28,67.06 33.27,67.06 H21.1 30.23,67.06 14.22,67.06 H2.1 10.16,66.04 8.89,66.04 8.64,65.79 6.1,65.79 5.84,66.04 1.78,66.04 1.27,65.53 1.27,58.93 2.29,58.93 | H13.14 32,22.86 34.29,25.15 56.13,25.15 56.39,24.89 64.26,24.89 64.26,23.11 62.74,21.59 60.96,21.59 H12.14 | H16.22 31.24,36.32 29.46,36.32 v29.21,36.58 | v3.81,45.72 H1.10 | H4.1 6.86,58.93 2.29,58.93 | 2.29,58.93 1.27,57.91 1.27,54.61 3.81,54.61 H6.1 | H16.8 28.45,28.45 2.29,28.45 1.27,27.43 1.27,24.13 3.81,24.13 H8.1

## Text on the board
_tsilk: ISP (Tiny24) | RS232 | ISP (Mega, Tiny2313) | + - | K | K | K | + - | 1Ok | 1Ok | AtTiny 2313 | AtMega 168/328 | AtTiny 24/44/84 | Drive Lines 1 ... 11 | +3v | Power | TX | RX | + - | + -